# Altium PCB 780-00002 rev 2, Sinistro Clock Gen.PcbDoc (part 3 of 6)
Units mil, origin at the board's own origin, x right, y up, seen from the top; angles counter-clockwise.
Board outline 5905.51 x 4330.71 mil, 10 copper layers (Top Layer (.GTL), MidLayer1 (*.G1), +12V (*.GP1), -12V (*.GP2), A & GND (*.GP3), Chassis E (*.GP4), +28V & VCC (*.GP5), MidLayer2 (*.G2), MidLayer3 (*.G3), Bottom Layer (.GBL)), stack 64.6 mil thick; 495 components, 327 nets, 1939 pads, 938 vias.
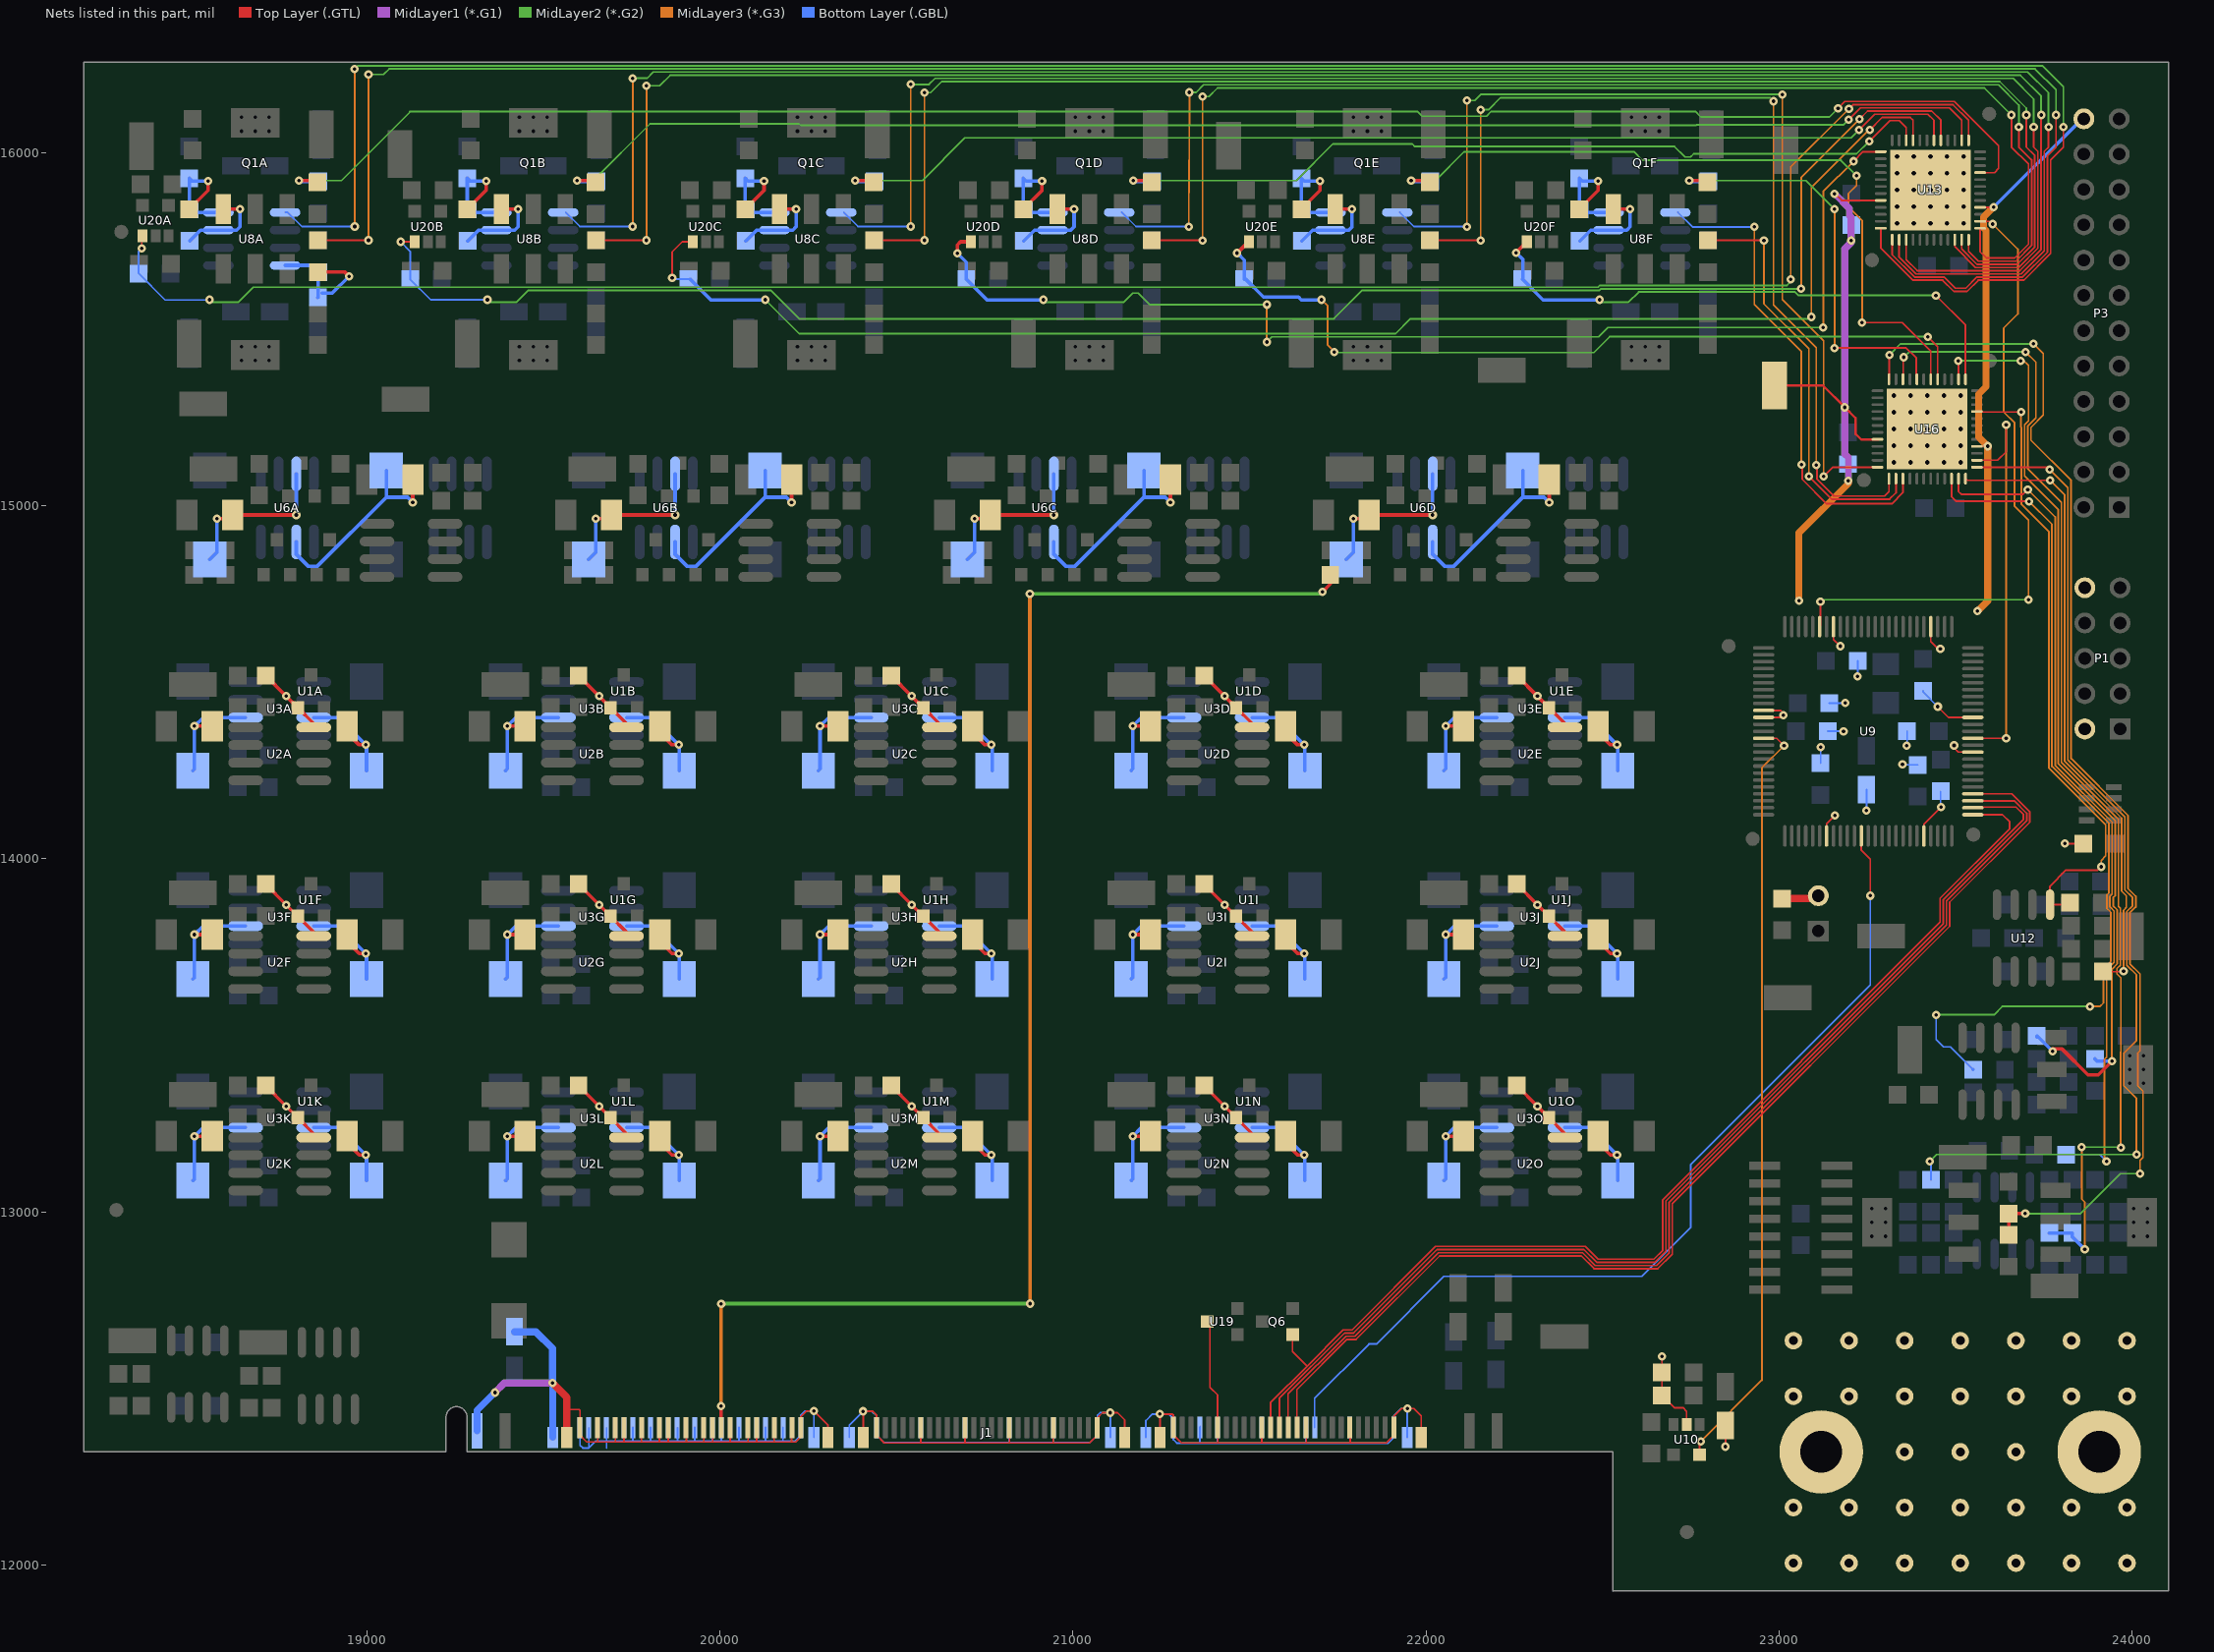
[diagram p11: the nets of this part, all layers, seen from the top]

## Via types
v1: diameter 24, hole 10, Top Layer (.GTL) to Bottom Layer (.GBL), 938 vias

## Nets (pads, with @x,y where several pads share a name; then routed paths per layer and width w, separated by ;. In a path a pad name is that pad's centre, name@x,y a point inside that pad or via, vN(x,y) a via of type N, cw(c..) or ccw(c..) an arc to the next point about the centre after c; other vN are vias at no path point) (continued)
CDO19: J1.123 R4D.2 | length 4124.3
  Top Layer (.GTL) w10: v1(20003,12450) 20004,12449 J1.123@20004,12388.09 ; v1(21706.5,14755) 21728.91,14777.4 R4D.2@21728.91,14803.31
  MidLayer2 (*.G2) w10: v1@20004,12740 v1(20879,12740) ; v1(20878,14750) v1@21708,14750
  MidLayer3 (*.G3) w10: v1(20003,12450) 20003,12738 v1(20004,12739) ; v1(20878,14750) v1(20879,12740)
CLK_100: U9.14 U10.5 | length 2173.5
  Top Layer (.GTL) w5: U10.5@22775,12312 22775,12347 v1(22778,12350) ; U9.14@22956.15,14340.95 22993.05,14340.95 v1(23014,14320)
  MidLayer3 (*.G3) w5: v1(22778,12350) 22951,12523 22951,14257 v1(23014,14320)
DAC_HI1: U8A.1 U13.12 | length 6647.7
  Top Layer (.GTL) w5: U13.12@23287.74,15785.22 23287.74,15730.08 23379.82,15638 23463.27,15638 23494.77,15606.5 23532.5,15606.5 23564,15638 23693.1,15638 23769,15713.9 23769,15979 23805,16015 v1(23805,16072)
  MidLayer2 (*.G2) w5: v1(18965,16236) 18974.5,16245.5 23745.39,16245.5 23805,16185.89 v1(23805,16072)
  MidLayer3 (*.G3) w5: v1(18965,16236) 18966,16235 v1(18966,15790)
  Bottom Layer (.GBL) w5: U8A.1@18768.94,15830.04 18776.34,15830.04 18816.38,15790 v1(18966,15790)
DAC_HI2: U8B.1 U13.14 | length 5634.2
  Top Layer (.GTL) w5: U13.14@23339.9,15752.74 23339.9,15703.37 23387.27,15656 23685.64,15656 23751,15721.36 23751,16003 23763,16015 v1(23763,16072)
  MidLayer2 (*.G2) w5: v1(19753.4,16210) 19794,16210 19811.5,16227.5 23703.99,16227.5 23763,16168.49 v1(23763,16072)
  MidLayer3 (*.G3) w5: v1@19746,16210 v1(19753.4,16210) v1(19753.4,15790)
  Bottom Layer (.GBL) w5: U8B.1@19563.74,15830.04 19603.78,15790 v1(19753.4,15790)
DAC_HI3: U8C.1 U13.22 | length 4549.8
  Top Layer (.GTL) w5: U13.22@23497.38,15752.74 23497.38,15733.16 23556.54,15674 23678.18,15674 23733,15728.82 23733,16003 23721,16015 v1(23721,16072)
  MidLayer2 (*.G2) w5: v1(20540.8,16192.49) 20592.49,16192.49 20609.5,16209.5 23662.6,16209.5 23721,16151.1 v1(23721,16072)
  MidLayer3 (*.G3) w5: v1(20540.8,15790) v1(20540.8,16192.49)
  Bottom Layer (.GBL) w5: U8C.1@20351.14,15830.04 20391.18,15790 v1(20540.8,15790)
DAC_HI4: U8D.1 U13.24 | length 3622
  Top Layer (.GTL) w5: U13.24@23536.76,15752.74 23536.76,15719.25 23564,15692 23670.73,15692 23715,15736.27 23715,15979 23679,16015 v1(23679,16072)
  MidLayer2 (*.G2) w5: v1(21330,16170) 21349,16170 21370.5,16191.5 23621.2,16191.5 23679,16133.7 v1(23679,16072)
  MidLayer3 (*.G3) w5: v1(21328.4,15789.78) v1(21330,16170)
  Bottom Layer (.GBL) w5: U8D.1@21138.54,15830.04 21178.58,15790 v1@21328.2,15790
DAC_HI5: U8E.1 U16.12 | length 2757.9
  Top Layer (.GTL) w5: v1(23126,15082) 23152.48,15108.48 U16.12@23278.74,15108.48
  MidLayer2 (*.G2) w5: v1(22115.8,16147) 22138,16147 22155,16164 v1(23009,16164)
  MidLayer3 (*.G3) w5: v1(22115.8,15789.78) v1(22115.8,16147) ; v1(23009,16164) 23009,15584 23126,15467 v1(23126,15082)
  Bottom Layer (.GBL) w5: U8E.1@21925.94,15830.04 21965.98,15790 v1@22115.61,15790
DAC_HI6: U8F.1 U16.15 | length 1370.7
  Top Layer (.GTL) w5: v1(23063,15116) 23065.5,15113.5 23065.5,15074.34 23134.84,15005 23319,15005 23350.59,15036.59 U16.15@23350.59,15076
  MidLayer3 (*.G3) w5: v1(22930,15789) 22930,15569 23063,15436 v1(23063,15116)
  Bottom Layer (.GBL) w5: U8F.1@22713.34,15830.04 22754.38,15789 v1(22930,15789)
DAC_LO1: R10A.2 U13.13 | length 6456.9
  Top Layer (.GTL) w5: R10A.2@18861.46,15750.83 19004.83,15750.83 v1(19005,15751) ; U13.13@23320.22,15752.74 23320.22,15710.32 23383.54,15647 23467,15647 23498.5,15615.5 23528.77,15615.5 23560.27,15647 23689.37,15647 23760,15717.63 23760,15991 23784,16015 v1(23784,16106)
  MidLayer2 (*.G2) w5: v1(19005,16221) 19048,16221 19063.5,16236.5 23724.69,16236.5 23784,16177.19 v1(23784,16106)
  MidLayer3 (*.G3) w5: v1(19005,15751) v1(19005,16221)
DAC_LO2: R10B.2 U13.15 | length 5478.8
  Top Layer (.GTL) w5: R10B.2@19648.87,15750.83 v1@19792.23,15750.83 ; U13.15@23359.59,15752.74 23359.59,15696.41 23391,15665 23681.91,15665 23742,15725.09 v1(23742,16106)
  MidLayer2 (*.G2) w5: v1(19792.4,16189) 19830,16189 19859.5,16218.5 23683.29,16218.5 23742,16159.79 v1(23742,16106)
  MidLayer3 (*.G3) w5: v1(19792.4,15751) v1(19792.4,16189)
DAC_LO3: R10C.2 U13.23 | length 4400.4
  Top Layer (.GTL) w5: R10C.2@20436.27,15750.83 v1@20579.63,15750.83 ; U13.23@23517.07,15752.74 23517.07,15726.2 23560.27,15683 23674.46,15683 23724,15732.54 23724,15991 23700,16015 v1(23700,16106)
  MidLayer2 (*.G2) w5: v1(20579.8,16169) 20597,16169 20628.5,16200.5 23624.93,16200.5 23700,16125.43 v1(23700,16106)
  MidLayer3 (*.G3) w5: v1(20579.8,15751) v1(20579.8,16169)
DAC_LO4: R10D.2 U13.25 | length 3495.6
  Top Layer (.GTL) w5: R10D.2@21223.67,15750.83 v1@21367.03,15750.83 ; U13.25@23569.24,15785.22 23569.24,15718.76 23587,15701 23667,15701 23706,15740 23706,15967 23658,16015 v1(23658,16106)
  MidLayer2 (*.G2) w5: v1(21367.4,16158) 21385,16158 21409.5,16182.5 23581.5,16182.5 v1(23658,16106)
  MidLayer3 (*.G3) w5: v1(21367.4,15750.78) v1(21367.4,16158)
DAC_LO5: R10E.2 U16.13 | length 2748
  Top Layer (.GTL) w5: R10E.2@22011.07,15750.83 v1@22154.43,15750.83 ; v1(23105,15115) 23107.5,15112.5 23107.5,15074.34 23154.84,15027 23299,15027 23311.22,15039.22 U16.13@23311.22,15076
  MidLayer2 (*.G2) w5: v1(22154.8,16121) 22177,16121 22211,16155 22974,16155 v1(22984,16145)
  MidLayer3 (*.G3) w5: v1(22154.8,15750.78) v1(22154.8,16121) ; v1(22984,16145) 22984,15568 23105,15447 v1(23105,15115)
DAC_LO6: R10F.2 U16.14 | length 1200.9
  Top Layer (.GTL) w5: R10F.2@22798.47,15750.83 v1(22957,15750.83) ; v1(23084,15082) 23148,15018 23313,15018 23330.91,15035.91 U16.14@23330.91,15076
  MidLayer3 (*.G3) w5: v1(22957,15750.83) 22957,15571 23084,15444 v1(23084,15082)
DAC_VDD: R42.1 U16.22 | length 2504
  Top Layer (.GTL) w5: U16.22@23488.39,15076 23488.39,15025.61 23502.15,15011.85 v1(23707.85,15011.85)
  MidLayer2 (*.G2) w5: v1(23444.46,13557.84) 23608.29,13557.84 23631.79,13581.34 23879.33,13581.34 v1@23880,13582
  MidLayer3 (*.G3) w5: v1(23707.85,15011.85) 23772.78,14946.92 23772.78,14260.95 23934,14099.73 23934,13903.12 23927.96,13897.07 23927.96,13859.38 23939.46,13847.88 23939.46,13709.57 23918.5,13688.62 23918.5,13591.5 23909,13582 23880.67,13582 v1(23880,13581.34)
  Bottom Layer (.GBL) w5: v1(23444.46,13557.84) 23444.46,13487.84 23465.46,13466.84 23485.46,13466.84 R42.1@23549.46,13402.84
DAC_VOD: R28.1 U16.25 | length 2941
  Top Layer (.GTL) w5: U16.25@23560.24,15108.48 23759.71,15108.48 v1(23766.6,15101.6)
  MidLayer2 (*.G2) w5: v1(23426.72,13142.54) 23446.22,13162.04 v1(24012,13162.04)
  MidLayer3 (*.G3) w5: v1(23766.6,15101.6) 23817.78,15050.41 23817.78,14279.59 23979,14118.37 23979,13996.64 23979,13911.58 24000.96,13889.62 24000.96,13866.84 23984.46,13850.34 23984.46,13698.39 24012,13670.85 24012,13484.66 23976.38,13449.04 23976.38,13356.63 24012,13321.02 v1(24012,13162.04)
  Bottom Layer (.GBL) w5: v1(23426.72,13142.54) 23430.21,13139.05 R28.1@23430.21,13089.92
DAC_VOG: R22.1 U16.24 | length 1782.9
  Top Layer (.GTL) w5: U16.24@23527.76,15076 23532.51,15071.25 v1(23767.25,15071.25) ; R22.1@23917,13680 23974.23,13680 v1(23975.46,13681.23)
  MidLayer3 (*.G3) w5: v1(23767.25,15071.25) 23808.78,15029.71 23808.78,14275.86 23970,14114.64 23970,13907.85 23983,13894.85 23983,13861.61 23975.46,13854.06 v1(23975.46,13681.23)
DAC_VRD: R48.1 U16.23 | length 2385.8
  Top Layer (.GTL) w5: U16.23@23508.07,15076 23508.07,15039.93 23516,15032 23691,15032 v1(23704.2,15045.2)
  MidLayer2 (*.G2) w5: v1@23926.54,13142.54 v1(23927,13143)
  MidLayer3 (*.G3) w5: v1(23704.2,15045.2) 23781.78,14967.62 23781.78,14264.67 23943,14103.46 23943,13899.39 23936.96,13893.35 23936.96,13863.11 23948.46,13851.61 23948.46,13705.85 23927.5,13684.89 23927.5,13438.04 23920.96,13431.5 23920.96,13149.04 v1(23927,13143)
  Bottom Layer (.GBL) w5: R48.1@23813,13162.04 23907.96,13162.04 v1(23927,13143)
DRV_SEL_N: J1.29 Q6.1 U9.51 | length 3269.6
  Top Layer (.GTL) w5: J1.29@21559.5,12389.15 21559.5,12459.58 21662.96,12563.04 ; Q6.1@21622,12652 21622,12604 21662.96,12563.04 ; 22670.5,12932.5 22670.5,12891.34 ; U9.51@23548.67,14124.41 23632.59,14124.41 23653.09,14103.91 23653.09,14084.91 23456,13887.82 23456,13819.82 22670.5,13034.32 22670.5,12891.34 ; 21662.96,12563.04 21765.43,12665.5 21790.9,12665.5 22027.27,12901.87 22450.95,12901.87 22486.82,12866 22645.16,12866 22670.5,12891.34
E: pad.0 pad.1 pad.2 pad.3 pad.4 pad.5 U13.0 U16.0
GND: C7.2 C12.1 C16.1 C17.1 C18.1 C19.1 C20.1 C21.1 C23.1 C24.1 C26.1 C31.1 C32.2 C34.1 C36.1 C55.2 C56.2 J1.1 J1.2 J1.11 J1.12 J1.21 J1.22 J1.31 J1.32 J1.41 J1.42 J1.46 J1.51 J1.52 J1.53 J1.54 J1.63 J1.64 J1.73 J1.74 J1.83 J1.84 J1.93 J1.94 J1.103 J1.104 J1.105 J1.106 J1.107 J1.110 J1.111 J1.114 J1.115 J1.116 J1.117 J1.120 J1.121 J1.124 J1.125 J1.126 J1.127 J1.130 J1.131 J1.134 J1.135 J1.136 J1.137 J1.140 J1.141 J1.144 J1.145 J1.146 J1.147 J1.150 J1.151 J1.154 J1.155 J1.156 J1.157 J1.158 J1.159 J1.160 J1.161 J1.162 J1.163 J1.164 J1.165 J1.166 J1.167 J1.168 J1.PC08 P1.2 P1.10 P2.2 P3.24 TP15.1 U9.10 U9.11 U9.32 U9.46 U9.60 U9.65 U9.79 U9.93 U10.2 U13.8 U13.28 U16.8 U16.28 U19.3 | length 14089.1
  Top Layer (.GTL) w5: 19566.5,12440 19601,12440 19604,12437 J1.155@19604,12388.09 19601,12385.08 19601,12369.9 19622.9,12348 19654,12348 ; J1.151@19654,12388.09 19654,12348 ; J1.147@19704,12366.9 J1.147@19704,12388.09 19704,12348.01 ; J1.145@19729,12388.09 19729,12348 ; J1.141@19778,12388.09 19778,12348 ; J1.137@19829,12388.09 19829,12348 ; J1.135@19854,12388.09 19854,12348 ; J1.131@19905,12388.09 19905,12348 ; J1.127@19955,12388.09 19955,12348 ; J1.125@19980,12388.09 19980,12348 ; J1.121@20029,12388.09 20029,12348 ; J1.117@20080,12388.09 20080,12348 ; J1.115@20104,12388.09 20104,12348 ; J1.111@20154,12388.09 20154,12348 ; J1.107@20203,12388.09 20203,12348 ; J1.105@20229,12362.01 20215,12348 20203,12348 ; J1.105@20229,12388.09 20229,12419 20246,12436 v1(20266,12436) 20306.5,12395.5 J1.165@20306.5,12361.09 ; J1.163@20406.5,12361.09 20406.5,12434.5 v1(20406,12435) 20433,12435 20444.16,12423.84 J1.103@20444.16,12388.09 20444.16,12366.9 20465.9,12345.16 21047.43,12345.16 21069.16,12366.9 J1.53@21069.16,12388.09 21069.16,12416.16 21084,12431 v1(21106,12431) 21126,12431 21146.5,12410.5 J1.161@21146.5,12361.09 ; 20569,12345.16 J1.93@20569,12393.08 ; 20694,12345.16 J1.83@20694,12393.09 ; 20820,12345.16 J1.73@20820,12393.09 ; 20944,12345.16 J1.63@20944,12393.09 ; v1(21246,12427) v1@21246.5,12426.5 ; J1.159@21246.5,12361.09 v1@21246.5,12426.5 ; U19.3@21380,12689 21388,12681 21388,12503 21409.5,12481.5 J1.41@21409.5,12389.15 ; J1.41@21410,12394.09 21410,12345.5 ; J1.31@21535,12394.09 21535,12345.5 ; J1.21@21661,12394.09 21661,12345.5 ; J1.11@21785,12394.09 21785,12345.5 ; J1.157@21986.5,12361.09 21986.5,12422.5 21966,12443 v1(21947,12443) 21931,12443 21909.5,12421.5 J1.1@21909.5,12389.15 21909.5,12367.96 21887.05,12345.5 21785,12345.5 ; v1(22668,12590) C12.1@22668,12545 C16.1@22668,12480 22703,12445 22728,12445 22738,12435 U10.2@22738,12398 ; v1(22848,12335) C7.2@22848,12395 ; U9.11@22956.15,14400 23005.78,14400 v1(23012.41,14406.63) 23012.41,14411.63 23004.35,14419.69 U9.10@22956.15,14419.69 ; TP15.1@22987,15340 23076,15340 ; P2.2@23103,13887 P2.2@23111,13895 ; U9.32@23134.3,14064.37 23134.3,14098.52 v1(23158.41,14122.63) ; U9.93@23153.98,14656.89 23153.98,14621.05 v1(23173.41,14601.63) ; v1@23158,15883 23177.04,15863.96 U13.8@23287.74,15863.96 ; U9.46@23409.89,14064.37 23409.89,14097.11 v1(23458.41,14145.63) ; U9.79@23429.57,14656.89 23429.57,14614.46 23450.41,14593.63 v1(23456.41,14593.63) ; v1(23449.41,14430.63) 23480.04,14400 U9.65@23548.67,14400 ; v1(23495.41,14320.63) 23495.41,14313.63 23507.46,14301.58 U9.60@23548.67,14301.58 ; U16.28@23560.24,15167.54 23590.54,15167.54 v1(23591,15168) ; U13.28@23569.24,15844.28 23606.28,15844.28 v1(23607,15845) ; v1(23809,14043) 23809.29,14042.71 C17.1@23862,14042.71 ; 19654,12348 19704,12348 ; 19704,12348 19729,12348 ; 19729,12348 19778,12348 ; 19778,12348 19829,12348 ; 19829,12348 19854,12348 ; 19854,12348 19905,12348 ; 19905,12348 19955,12348 ; 19955,12348 19980,12348 ; 19980,12348 20029,12348 ; 20029,12348 20080,12348 ; 20080,12348 20104,12348 ; 20104,12348 20154,12348 ; 20154,12348 20203,12348 ; v1@21246.5,12426.5 21282.5,12426.5 21284.5,12424.5 J1.51@21284.5,12389.15 21284.5,12367.96 21306.96,12345.5 21410,12345.5 ; 21410,12345.5 21535,12345.5 ; 21535,12345.5 21661,12345.5 ; 21661,12345.5 21785,12345.5
  Top Layer (.GTL) w7: TP15.1@22987,15340 23124,15340 v1(23186,15278) 23216.5,15247.5 23216.5,15202.85 23232.59,15186.76 23278.28,15186.76 U16.8@23278.74,15187.22
  Top Layer (.GTL) w20: v1(19526,12515) 19566.5,12474.5 19566.5,12440 J1.167@19566.5,12361.09 ; C56.2@23009,13887 P2.2@23103,13887
  MidLayer1 (*.G1) w20: v1(19363,12488) 19390,12515 v1(19526,12515) ; v1(23157,15883) 23199.16,15840.84 23199.16,15821.61 ; v1(23196,15070.26) 23196,15135.77 23186,15145.77 v1(23186,15278) 23186,15726.77 v1@23204,15744.77 ; v1(23204,15750) 23204,15816.77
  MidLayer3 (*.G3) w20: v1(23056,14730) 23056,14922.33 23196,15062.33 v1(23196,15070.26) ; v1(23562,14701) 23591,14730 v1(23591,15168) 23565,15194 23565,15315.23 23586,15336.23 23586,15779.23 23579,15786.23 23579,15817 v1(23607,15845)
  Bottom Layer (.GBL) w5: J1.156@19604,12388.09 19604,12339 19612.01,12331 19629,12331 ; J1.154@19629,12388.09 19629,12331 ; 19679,12331 J1.150@19679,12388.09 ; 19729,12351 J1.146@19729,12389.09 ; 19754,12351 J1.144@19754,12389.09 ; 19804,12351 J1.140@19804,12390.09 ; 19854,12351 J1.136@19854,12389.09 ; 19880,12351 J1.134@19880,12388.09 ; 19929,12351 J1.130@19929,12389.09 ; 19979,12351 J1.126@19979,12389.09 ; 20004,12351 J1.124@20004,12389.09 ; 20054,12351 J1.120@20054,12389.09 ; 20104,12351 J1.116@20104,12389.09 ; 20129,12351 J1.114@20129,12390.09 ; 20179,12351 J1.110@20179,12390.09 ; J1.166@20266.5,12361.09 20266.5,12435.5 v1(20266,12436) 20241,12436 20229,12424 J1.106@20229,12388.09 20229,12366.89 20213.11,12351 19649,12351 19629,12331 ; J1.164@20366.5,12361.09 20366.5,12395.5 v1(20406,12435) 20431,12435 20444.16,12421.84 J1.104@20444.16,12388.09 20444.16,12366.9 20465.06,12346 21048.27,12346 21070,12367.73 21070,12387.25 J1.54@21069.16,12388.09 21069.16,12423.16 21077,12431 v1(21106,12431) 21106.5,12430.5 J1.162@21106.5,12361.09 ; 20569,12346 J1.94@20569,12390.08 ; 20694,12346 J1.84@20694,12390.08 ; 20819,12346 J1.74@20819,12390.08 ; 20944,12346 J1.64@20944,12390.08 ; J1.160@21206.5,12361.09 21206.5,12408.5 21225,12427 v1(21246,12427) 21271,12427 21284.5,12413.5 J1.52@21284.5,12389.15 21284.5,12354.5 21294,12345 21893,12345 21909.5,12361.5 J1.2@21909.5,12389.15 21909.5,12423.5 21929,12443 v1(21947,12443) 21946.5,12442.5 J1.158@21946.5,12361.09 ; 21359.5,12346.5 J1.46@21359.5,12389.15 ; J1.46@21360,12368.45 J1.46@21360,12392.08 ; 21409.5,12345.5 J1.42@21409.5,12389.15 ; J1.42@21410,12367.46 J1.42@21410,12392.08 ; 21534.5,12347.5 J1.32@21534.5,12389.15 ; J1.32@21535,12368.45 J1.32@21535,12392.08 ; J1.22@21659,12368.46 J1.22@21659,12392.08 ; 21659.5,12346.5 J1.22@21659.5,12389.15 ; J1.12@21784,12367.45 J1.12@21784,12392.08 ; 21784.5,12345.5 J1.12@21784.5,12389.15 ; C18.1@23117.41,14270.63 v1(23117.41,14315.63) ; C26.1@23137.41,14360.63 v1(23182.41,14360.63) ; C19.1@23142.41,14440.63 v1(23187.41,14440.63) ; v1@23195,15071.26 C36.1@23195,15117.26 ; v1(23204,15750) C34.1@23204,15794 ; v1(23222.41,14515.63) C23.1@23222.41,14560.63 ; v1(23247.41,14136.63) C32.2@23247.41,14195.63 ; v1(23349.41,14266.63) 23350.41,14265.63 C20.1@23392.41,14265.63 ; v1(23361.41,14319.63) 23362.41,14320.63 C31.1@23362.41,14360.63 ; C21.1@23407.41,14475.63 23407.41,14472.63 v1(23449.41,14430.63) ; C24.1@23457.41,14190.63 23457.41,14146.63 v1(23458.41,14145.63)
  Bottom Layer (.GBL) w10: v1(23607,15845) 23607.7,15845 23857.7,16095 P3.24@23863,16095
  Bottom Layer (.GBL) w20: J1.PC08@19312.6,12379.15 19312.6,12437.6 v1(19363,12488) ; C55.2@19418,12660 19479,12660 19526,12613 v1(19526,12515) 19526.5,12514.5 J1.168@19526.5,12361.09
I_ADDR0: J1.23 U9.54 | length 3213
  Top Layer (.GTL) w5: J1.23@21634.5,12389.15 21634.5,12496.4 21776.61,12638.5 21802.09,12638.5 22038.46,12874.87 22439.77,12874.87 22475.64,12839 22512,12839 22656.35,12839 22697.5,12880.15 22697.5,13023.14 23483,13808.64 23483,13876.64 23710,14103.64 23710,14132.36 23658.9,14183.47 U9.54@23548.67,14183.47
I_ADDR1: J1.25 U9.53 | length 3241.5
  Top Layer (.GTL) w5: J1.25@21609.5,12389.15 21609.5,12484.12 21772.88,12647.5 21798.36,12647.5 22034.73,12883.87 22443.5,12883.87 22479.37,12848 22512,12848 22652.62,12848 22688.5,12883.88 ; 22688.5,12925.04 22688.5,12883.88 ; U9.53@23548.67,14163.78 23665.85,14163.78 23701,14128.63 23701,14107.37 23474,13880.37 23474,13812.37 22688.5,13026.87 22688.5,12883.88
I_ADDR2: J1.27 U9.52 | length 3230.3
  Top Layer (.GTL) w5: J1.27@21584.5,12389.15 21584.5,12471.85 21769.15,12656.5 21794.63,12656.5 22031,12892.87 22447.23,12892.87 22483.1,12857 22512,12857 22648.89,12857 22679.5,12887.61 ; 22679.5,12928.77 22679.5,12887.61 ; U9.52@23548.67,14144.1 23550.57,14146 23670.91,14146 23692,14124.9 23692,14111.1 23465,13884.1 23465,13816.1 22679.5,13030.6 22679.5,12887.61
LOAD_MAX1_N: U9.95 U13.26 | length 1841.2
  Top Layer (.GTL) w5: U9.95@23114.61,14656.89 23117,14659.28 v1(23117,14728) ; U13.26@23569.24,15804.91 23597.09,15804.91 v1(23605,15797)
  MidLayer2 (*.G2) w5: v1(23117,14728) 23122,14733 v1(23706,14733)
  MidLayer3 (*.G3) w5: v1(23605,15797) 23676,15726 23676,15542.33 23636,15502.33 23636,15265.27 23667,15234.27 23667,14997.54 23706,14958.54 v1(23706,14733)
  other v1: 23117,14728 23706,14733
LOAD_MAX2_N: U9.62 U16.26 | length 1151.9
  Top Layer (.GTL) w5: U9.62@23548.67,14340.95 23548.72,14341 v1(23643,14341) ; U16.26@23560.24,15128.17 23618.97,15128.17 23643,15152.2 v1(23643,15229)
  MidLayer3 (*.G3) w5: v1(23643,14341) v1(23643,15229)
MON_HI1: R13A.1 R14A.2 U13.33 | length 5214
  Top Layer (.GTL) w5: v1(23167,16125) 23186,16144 23496.48,16144 23621.5,16018.98 23621.5,15954.5 23609.7,15942.7 U13.33@23569.24,15942.7
  Top Layer (.GTL) w10: v1(18808.31,15920.39) 18859.22,15920.39 R13A.1@18861.46,15918.15
  MidLayer2 (*.G2) w5: v1(18808.31,15920.39) 18928.39,15920.39 19121,16113 19122.25,16116.03 21975.49,16116.03 21989.01,16102.5 22171.23,16102.5 22184.75,16116.03 22762.89,16116.03 22778.92,16100 23142,16100 v1(23167,16125)
  Bottom Layer (.GBL) w10: v1(18808.31,15920.39) 18810.56,15918.15 R14A.2@18862.88,15918.15
MON_HI2: R13B.1 R14B.2 U13.38 | length 4190.6
  Top Layer (.GTL) w5: v1(23196.95,16093.05) 23229.9,16126 23482.07,16126 23517.07,16091 U13.38@23517.07,16034.24
  Top Layer (.GTL) w10: v1(19595.72,15920.39) 19646.62,15920.39 R13B.1@19648.87,15918.15
  MidLayer2 (*.G2) w5: v1(19595.72,15920.39) 19641.79,15920.39 19802.4,16081 20224.68,16081 20228.65,16077.03 22764.88,16077.03 22765.85,16078 23181.9,16078 v1(23196.95,16093.05)
  Bottom Layer (.GBL) w10: v1(19595.72,15920.39) 19597.96,15918.15 R14B.2@19650.28,15918.15
MON_HI3: R13C.1 R14C.2 U13.42 | length 3306.3
  Top Layer (.GTL) w5: v1(23226.65,16063.35) 23271.3,16108 23421.33,16108 23438.33,16091 U13.42@23438.33,16034.24
  Top Layer (.GTL) w10: v1(20383.12,15920.39) 20434.02,15920.39 R13C.1@20436.27,15918.15
  MidLayer2 (*.G2) w5: v1(20383.12,15920.39) 20573.39,15920.39 20694,16041 23204.3,16041 v1(23226.65,16063.35)
  Bottom Layer (.GBL) w10: v1(20383.12,15920.39) 20385.36,15918.15 R14C.2@20437.68,15918.15
MON_HI4: R13D.1 R14D.2 U13.46 | length 2443.8
  Top Layer (.GTL) w5: v1(23255,16032) 23256,16032 23314,16090 23340,16090 23359.59,16070.41 U13.46@23359.59,16034.24
  Top Layer (.GTL) w10: v1(21170.52,15920.39) 21221.43,15920.39 R13D.1@21223.67,15918.15
  MidLayer2 (*.G2) w5: v1(21170.52,15920.39) 21632.55,15920.39 21735.97,16023.82 21961.37,16023.82 21968.61,16016.58 22703.69,16016.58 22733.45,15986.82 22748.77,15986.82 22757.96,15996 23219,15996 v1(23255,16032)
  Bottom Layer (.GBL) w10: v1(21170.52,15920.39) 21172.76,15918.15 R14D.2@21225.08,15918.15
MON_HI5: R13E.1 R14E.2 U16.42 | length 2182.1
  Top Layer (.GTL) w5: v1(23235,15518) 23349,15518 23429.33,15437.67 U16.42@23429.33,15357.5
  Top Layer (.GTL) w10: v1(21957.92,15920.39) 22008.83,15920.39 R13E.1@22011.07,15918.15
  MidLayer2 (*.G2) w5: v1(21957.92,15920.39) 22026.6,15920.39 22108.21,16002 22589,16002 22613.18,15977.82 23175.18,15977.82 v1(23219,15934)
  MidLayer3 (*.G3) w5: v1(23219,15934) 23219,15906.25 23196,15883.25 23196,15846 23235,15807 v1(23235,15518)
  Bottom Layer (.GBL) w10: v1(21957.92,15920.39) 21960.17,15918.15 R14E.2@22012.49,15918.15
MON_HI6: R13F.1 R14F.2 U16.44 | length 1251.9
  Top Layer (.GTL) w5: v1(23157,15446) 23360,15446 23388.5,15417.5 23388.5,15358.96 U16.44@23389.96,15357.5
  Top Layer (.GTL) w10: v1(22745.32,15920.39) 22796.23,15920.39 R13F.1@22798.47,15918.15
  MidLayer2 (*.G2) w5: v1(22745.32,15920.39) 23075.61,15920.39 v1(23157,15839)
  MidLayer3 (*.G3) w5: v1(23157,15446) v1(23157,15839)
  Bottom Layer (.GBL) w10: v1(22745.32,15920.39) 22747.57,15918.15 R14F.2@22799.89,15918.15
MON_LO1: R23A.1 U13.37 U20A.1 | length 5825.2
  Top Layer (.GTL) w5: v1(18363,15728) 18363,15762 U20A.1@18365,15764 ; v1(23197.6,16123.4) 23209.21,16135 23492.76,16135 23536.76,16091 U13.37@23536.76,16034.24
  MidLayer2 (*.G2) w5: v1(18554.38,15582.8) 18561.07,15576.11 18636.84,15576.11 18679.17,15618.43 22487.24,15618.43 22491.81,15623 23022,15623 23033,15634 v1(23033,15640)
  MidLayer3 (*.G3) w5: v1(23033,15640) 23033,15958.79 v1(23197.6,16123.4)
  Bottom Layer (.GBL) w5: v1(18363,15728) 18354,15719 R23A.1@18354,15657 18428.91,15582.09 v1@18553.67,15582.09
  Bottom Layer (.GBL) w10: v1@18553.67,15582.09 v1(18554.38,15582.8)
MON_LO2: R23B.1 U13.41 U20B.1 | length 5063
  Top Layer (.GTL) w5: v1(19096,15747) U20B.1@19136,15747 ; v1(23227.3,16093.7) 23250.6,16117 23432.01,16117 23458.01,16091 U13.41@23458.01,16034.24
  MidLayer2 (*.G2) w5: v1(19341.78,15582.8) 19348.47,15576.11 19424.25,15576.11 19457.57,15609.43 20144.57,15609.43 20225.14,15528.86 21739.21,15528.86 21819.77,15609.43 22490.97,15609.43 22494.64,15613.11 22573.85,15613.11 22574.37,15613.63 v1(23062.32,15613.63)
  MidLayer3 (*.G3) w5: v1(23062.32,15613.63) 23062.32,15928.72 v1(23227.3,16093.7)
  Bottom Layer (.GBL) w5: v1(19096,15747) 19123,15720 R23B.1@19123,15641 19181.2,15582.8 v1(19341.78,15582.8)
  Bottom Layer (.GBL) w10: v1@19341.07,15582.09 v1(19341.78,15582.8)
  other v1: 19341.78,15582.8
MON_LO3: R23C.1 U13.45 U20C.1 | length 4252.7
  Top Layer (.GTL) w5: v1(19865,15645) 19865,15718 19894,15747 U20C.1@19923.4,15747 ; v1(23257,16064) 23292,16099 23371.28,16099 23379.28,16091 U13.45@23379.28,16034.24
  MidLayer2 (*.G2) w5: v1(20129.18,15582.8) 20225.44,15486.54 21913.42,15486.54 21955.74,15528.86 23085.86,15528.86 v1(23091,15534)
  MidLayer3 (*.G3) w5: v1(23091,15534) 23091,15901 23254,16064 v1(23257,16064)
  Bottom Layer (.GBL) w5: v1(19865,15645) 19869,15641 R23C.1@19910.4,15641 R23C.1@19916,15641
  Bottom Layer (.GBL) w10: R23C.1@19916,15641 19974.91,15582.09 20128.47,15582.09 v1(20129.18,15582.8)
MON_LO4: R23D.1 U13.1 U20D.1 | length 3344.7
  Top Layer (.GTL) w5: v1(23211,15975) 23237.76,16001.76 U13.1@23287.74,16001.76
  Top Layer (.GTL) w10: v1(20673,15714) 20673,15738 20682,15747 U20D.1@20710.8,15747
  MidLayer2 (*.G2) w5: v1(20916.58,15582.8) 20923.27,15576.11 21144.56,15576.11 21169.75,15601.3 21185.07,15601.3 21217.37,15569 v1(21549,15569) ; v1(21549,15463) 21563.54,15477.54 22489.06,15477.54 22515.52,15504 v1(23125,15504)
  MidLayer3 (*.G3) w5: v1(21549,15463) v1(21549,15569) ; v1(23125,15504) 23125,15889 v1(23211,15975)
  Bottom Layer (.GBL) w10: v1(20673,15714) 20697.8,15689.2 R23D.1@20697.8,15641 20756.72,15582.09 20915.87,15582.09 v1(20916.58,15582.8)
MON_LO5: R23E.1 U16.41 U20E.1 | length 2365.2
  Top Layer (.GTL) w5: v1(23421,15478) 23449.02,15449.98 U16.41@23449.02,15357.5
  Top Layer (.GTL) w10: v1(21465,15715) 21497,15747 U20E.1@21498.2,15747
  MidLayer2 (*.G2) w5: v1(21740,15435) 21741.58,15433.42 22475.42,15433.42 22520,15478 v1(23421,15478)
  MidLayer3 (*.G3) w5: v1(21703.99,15582.8) 21721.5,15565.28 21721.5,15454.5 v1@21740,15436
  Bottom Layer (.GBL) w10: v1(21465,15715) 21485.21,15694.79 R23E.1@21485.21,15641 21489,15641 21540,15590 21638.98,15590 21646.9,15582.09 v1@21703.28,15582.09
MON_LO6: R23F.1 U16.37 U20F.1 | length 1614
  Top Layer (.GTL) w5: v1(23444,15595) 23527.76,15511.24 U16.37@23527.76,15357.5
  Top Layer (.GTL) w10: v1(22255,15716) 22255,15716.39 U20F.1@22285.61,15747
  MidLayer2 (*.G2) w5: v1(22491.39,15582.8) 22498.08,15576.11 22573.85,15576.11 22602.37,15604.63 23045.16,15604.63 23054.66,15595.13 23443.88,15595.13 v1(23444,15595)
  Bottom Layer (.GBL) w10: v1(22255,15716) 22274,15697 22274,15642.39 R23F.1@22272.61,15641 22331.52,15582.09 22490.68,15582.09 v1(22491.39,15582.8)
MON_VDD: R43.1 R44.1 U16.38 | length 2698.3
  Top Layer (.GTL) w5: v1(23507,15410) 23508.07,15408.93 U16.38@23508.07,15357.5
  Top Layer (.GTL) w10: v1(23774.46,13454.84) 23774.46,13460.84 23801.46,13460.84 23874.46,13387.84 23903.46,13387.84 v1(23942.46,13426.84)
  MidLayer2 (*.G2) w5: v1(23507,15410) 23685,15410 v1@23689,15414
  MidLayer3 (*.G3) w5: v1(23684,15409) 23689,15414 23706,15397 23706,15239.46 23695,15228.46 23695,15084.1 23790.78,14988.31 23790.78,14268.4 23952,14107.18 23952,13985.46 23952,13895.66 23945.96,13889.62 23945.96,13866.84 23957.46,13855.34 23957.46,13702.12 23942.46,13687.12 v1(23942.46,13426.84)
  Bottom Layer (.GBL) w10: R43.1@23729.46,13495.56 R43.1@23729.46,13497.84 23731.46,13497.84 v1(23774.46,13454.84) ; R44.1@23894.46,13432.83 23900.46,13426.84 v1(23942.46,13426.84)
MON_VOD: R31.1 R32.2 U16.48 | length 3507
  Top Layer (.GTL) w5: U16.48@23311.22,15357.5 23312,15358.28 v1(23312,15426)
  Top Layer (.GTL) w10: R31.1@23650.22,12934.92 R32.2@23650.22,12994.92 v1(23697.09,12994.92)
  MidLayer2 (*.G2) w5: v1(23312,15426) 23343.7,15457.7 v1(23720.7,15457.7) ; v1(23697.09,12994.92) 23853.26,12994.92 23966.34,13108 v1(24022,13108)
  MidLayer3 (*.G3) w5: v1@23691.22,13000.8 v1(23697.09,12994.92) ; v1(23720.7,15457.7) 23748,15430.4 23748,15256 23713,15221 23713,15184.89 23826.78,15071.11 23826.78,14283.31 23988,14122.1 23988,14000.37 23988,13915.3 24009.96,13893.35 24009.96,13863.11 23993.46,13846.61 23993.46,13702.12 24022,13673.58 24022,13455.29 24015.75,13449.04 24015.75,13356.63 24030.5,13341.89 24030.5,13154.38 24022,13145.88 v1(24022,13108)
MON_VOG: R26.2 U12.5 U16.33 | length 1801
  Top Layer (.GTL) w5: U16.33@23561.77,15267.5 U16.33@23560.24,15265.96 23561.2,15265 v1(23685,15265) ; R26.2@23824,13875 23818.49,13869.49 U12.5@23767,13869.49 23767,13922 23812.5,13967.5 23902.5,13967.5 v1(23912,13977)
  MidLayer3 (*.G3) w5: v1(23685,15265) 23685,15222 23686,15221 23686,15053.16 23685.7,15052.86 23685.7,15004.3 23763.78,14926.22 23763.78,14257.22 23925,14096 23925,14007.77 23912,13994.77 v1(23912,13977) v1@23912,13976
MON_VRD: R34.2 R35.1 U16.46 | length 3339.7
  Top Layer (.GTL) w5: U16.46@23350.59,15357.5 23351.5,15358.41 23351.5,15418.5 v1(23353,15420)
  Top Layer (.GTL) w10: v1(23865.72,12893.54) v1@23867.24,12892.02
  MidLayer2 (*.G2) w5: v1(23353,15420) 23368,15435 v1(23698,15435) ; v1(23857,13183) 23967,13183 v1(23968,13182)
  MidLayer3 (*.G3) w5: v1(23698,15435) 23727,15406 23727,15247.73 23704,15224.73 23704,15104.79 23799.78,15009.01 23799.78,14272.13 23961,14110.91 23961,13864.52 23966.46,13859.06 23966.46,13698.39 23956.96,13688.89 23956.96,13673.56 23968,13662.52 23968,13453.38 23967.38,13452.77 23967.38,13182.62 v1(23968,13182) ; v1(23857,13183) 23857.22,13182.78 23857.22,13035.88 23865.72,13027.38 v1(23865.72,12893.54)
  Bottom Layer (.GBL) w10: R34.2@23765.22,12939.92 R35.1@23830.21,12939.92 23830.21,12929.05 v1(23865.72,12893.54)
  other v1: 23865.72,12893.54
MPP: J1.20 U9.37 | length 2677.8
  Top Layer (.GTL) w5: U9.37@23232.72,14064.37 23232.72,14023.36 23258,13998.08 v1(23258,13895)
  Bottom Layer (.GBL) w5: J1.20@21684.5,12389.15 21684.5,12471.58 21838.43,12625.5 21859.4,12625.5 22050.9,12817 22610.9,12817 22750,12956.1 22750,13134.1 23258,13642.1 v1(23258,13895)
NetC1A_pos: C1A.POS L1A.2 U3A.6 | length 333
  Top Layer (.GTL) w10: v1(18512.29,14375.39) L1A.2@18562.53,14375.39
  Bottom Layer (.GBL) w10: C1A.POS@18507.37,14249.39 18512.29,14254.31 v1(18512.29,14375.39) 18536.5,14399.61 U3A.6@18656.98,14399.61
NetC1B_pos: C1B.POS L1B.2 U3B.6 | length 333
  Top Layer (.GTL) w10: v1(19398.12,14375.39) L1B.2@19448.35,14375.39
  Bottom Layer (.GBL) w10: C1B.POS@19393.2,14249.39 19398.12,14254.31 v1(19398.12,14375.39) 19422.33,14399.61 U3B.6@19542.8,14399.61
NetC1C_pos: C1C.POS L1C.2 U3C.6 | length 333
  Top Layer (.GTL) w10: v1(20283.95,14375.39) L1C.2@20334.18,14375.39
  Bottom Layer (.GBL) w10: C1C.POS@20279.02,14249.39 20283.95,14254.31 v1(20283.95,14375.39) 20308.16,14399.61 U3C.6@20428.63,14399.61
NetC1D_pos: C1D.POS L1D.2 U3D.6 | length 333
  Top Layer (.GTL) w10: v1(21169.77,14375.39) L1D.2@21220.01,14375.39
  Bottom Layer (.GBL) w10: C1D.POS@21164.85,14249.39 21169.77,14254.31 v1(21169.77,14375.39) 21193.98,14399.61 U3D.6@21314.46,14399.61
NetC1E_pos: C1E.POS L1E.2 U3E.6 | length 333
  Top Layer (.GTL) w10: v1(22055.6,14375.39) L1E.2@22105.84,14375.39
  Bottom Layer (.GBL) w10: C1E.POS@22050.68,14249.39 22055.6,14254.31 v1(22055.6,14375.39) 22079.81,14399.61 U3E.6@22200.28,14399.61
NetC1F_pos: C1F.POS L1F.2 U3F.6 | length 333
  Top Layer (.GTL) w10: v1(18512.29,13784.84) L1F.2@18562.53,13784.84
  Bottom Layer (.GBL) w10: C1F.POS@18507.37,13658.84 18512.29,13663.76 v1(18512.29,13784.84) 18536.5,13809.05 U3F.6@18656.98,13809.05
NetC1G_pos: C1G.POS L1G.2 U3G.6 | length 333
  Top Layer (.GTL) w10: v1(19398.12,13784.84) L1G.2@19448.35,13784.84
  Bottom Layer (.GBL) w10: C1G.POS@19393.2,13658.84 19398.12,13663.76 v1(19398.12,13784.84) 19422.33,13809.05 U3G.6@19542.8,13809.05
NetC1H_pos: C1H.POS L1H.2 U3H.6 | length 333
  Top Layer (.GTL) w10: v1(20283.95,13784.84) L1H.2@20334.18,13784.84
  Bottom Layer (.GBL) w10: C1H.POS@20279.02,13658.84 20283.95,13663.76 v1(20283.95,13784.84) 20308.16,13809.05 U3H.6@20428.63,13809.05
NetC1I_pos: C1I.POS L1I.2 U3I.6 | length 333
  Top Layer (.GTL) w10: v1(21169.77,13784.84) L1I.2@21220.01,13784.84
  Bottom Layer (.GBL) w10: C1I.POS@21164.85,13658.84 21169.77,13663.76 v1(21169.77,13784.84) 21193.98,13809.05 U3I.6@21314.46,13809.05
NetC1J_pos: C1J.POS L1J.2 U3J.6 | length 333
  Top Layer (.GTL) w10: v1(22055.6,13784.84) L1J.2@22105.84,13784.84
  Bottom Layer (.GBL) w10: C1J.POS@22050.68,13658.84 22055.6,13663.76 v1(22055.6,13784.84) 22079.81,13809.05 U3J.6@22200.28,13809.05
NetC1K_pos: C1K.POS L1K.2 U3K.6 | length 333
  Top Layer (.GTL) w10: v1(18512.29,13213.98) L1K.2@18562.53,13213.98
  Bottom Layer (.GBL) w10: C1K.POS@18507.37,13087.98 18512.29,13092.9 v1(18512.29,13213.98) 18536.5,13238.19 U3K.6@18656.97,13238.19
NetC1L_pos: C1L.POS L1L.2 U3L.6 | length 333
  Top Layer (.GTL) w10: v1(19398.12,13213.98) L1L.2@19448.35,13213.98
  Bottom Layer (.GBL) w10: C1L.POS@19393.2,13087.98 19398.12,13092.9 v1(19398.12,13213.98) 19422.33,13238.19 U3L.6@19542.8,13238.19
NetC1M_pos: C1M.POS L1M.2 U3M.6 | length 333
  Top Layer (.GTL) w10: v1(20283.95,13213.98) L1M.2@20334.18,13213.98
  Bottom Layer (.GBL) w10: C1M.POS@20279.02,13087.98 20283.95,13092.9 v1(20283.95,13213.98) 20308.16,13238.19 U3M.6@20428.63,13238.19
NetC1N_pos: C1N.POS L1N.2 U3N.6 | length 333
  Top Layer (.GTL) w10: v1(21169.77,13213.98) L1N.2@21220.01,13213.98
  Bottom Layer (.GBL) w10: C1N.POS@21164.85,13087.98 21169.77,13092.9 v1(21169.77,13213.98) 21193.98,13238.19 U3N.6@21314.46,13238.19
NetC1O_pos: C1O.POS L1O.2 U3O.6 | length 333
  Top Layer (.GTL) w10: v1(22055.6,13213.98) L1O.2@22105.84,13213.98
  Bottom Layer (.GBL) w10: C1O.POS@22050.68,13087.98 22055.6,13092.9 v1(22055.6,13213.98) 22079.81,13238.19 U3O.6@22200.28,13238.19
NetC2A_2: C2A.2 U1A.1 U2A.8 | length 209.3
  Top Layer (.GTL) w10: C2A.2@18714.06,14518.82 18714.06,14518.11 v1(18772.12,14460.05) U1A.1@18804.61,14427.56 18849.89,14382.28 U2A.8@18849.89,14371.65
  Bottom Layer (.GBL) w10: v1@18767.98,14455.9 v1(18772.12,14460.05)
NetC2B_2: C2B.2 U1B.1 U2B.8 | length 209.3
  Top Layer (.GTL) w10: C2B.2@19599.89,14518.82 19599.89,14518.11 v1(19657.95,14460.05) U1B.1@19690.44,14427.56 19735.72,14382.28 U2B.8@19735.72,14371.66
  Bottom Layer (.GBL) w10: v1@19653.8,14455.9 v1(19657.95,14460.05)
NetC2C_2: C2C.2 U1C.1 U2C.8 | length 209.3
  Top Layer (.GTL) w10: C2C.2@20485.72,14518.82 20485.72,14518.11 v1(20543.78,14460.05) U1C.1@20576.27,14427.56 20621.54,14382.28 U2C.8@20621.54,14371.65
  Bottom Layer (.GBL) w10: v1@20539.63,14455.9 v1(20543.78,14460.05)
NetC2D_2: C2D.2 U1D.1 U2D.8 | length 209.3
  Top Layer (.GTL) w10: C2D.2@21371.54,14518.82 21371.54,14518.11 v1(21429.6,14460.05) U1D.1@21462.09,14427.56 21507.37,14382.28 U2D.8@21507.37,14371.65
  Bottom Layer (.GBL) w10: v1@21425.46,14455.9 v1(21429.6,14460.05)
NetC2E_2: C2E.2 U1E.1 U2E.8 | length 209.3
  Top Layer (.GTL) w10: C2E.2@22257.37,14518.82 22257.37,14518.11 v1(22315.43,14460.05) U1E.1@22347.92,14427.56 22393.2,14382.28 U2E.8@22393.2,14371.66
  Bottom Layer (.GBL) w10: v1@22311.28,14455.9 v1(22315.43,14460.05)
NetC2F_2: C2F.2 U1F.1 U2F.8 | length 209.3
  Top Layer (.GTL) w10: C2F.2@18714.06,13928.27 18714.06,13927.56 v1(18772.12,13869.5) U1F.1@18804.61,13837.01 18849.89,13791.73 U2F.8@18849.89,13781.1
  Bottom Layer (.GBL) w10: v1@18767.98,13865.35 v1(18772.12,13869.5)
NetC2G_2: C2G.2 U1G.1 U2G.8 | length 209.3
  Top Layer (.GTL) w10: C2G.2@19599.89,13928.27 19599.89,13927.56 v1(19657.95,13869.5) U1G.1@19690.44,13837.01 19735.72,13791.73 U2G.8@19735.72,13781.1
  Bottom Layer (.GBL) w10: v1@19653.8,13865.35 v1(19657.95,13869.5)
NetC2H_2: C2H.2 U1H.1 U2H.8 | length 209.3
  Top Layer (.GTL) w10: C2H.2@20485.72,13928.27 20485.72,13927.56 v1(20543.78,13869.5) U1H.1@20576.27,13837.01 20621.54,13791.73 U2H.8@20621.54,13781.1
  Bottom Layer (.GBL) w10: v1@20539.63,13865.35 v1(20543.78,13869.5)
NetC2I_2: C2I.2 U1I.1 U2I.8 | length 209.3
  Top Layer (.GTL) w10: C2I.2@21371.54,13928.27 21371.54,13927.56 v1(21429.6,13869.5) U1I.1@21462.09,13837.01 21507.37,13791.73 U2I.8@21507.37,13781.1
  Bottom Layer (.GBL) w10: v1@21425.46,13865.35 v1(21429.6,13869.5)
NetC2J_2: C2J.2 U1J.1 U2J.8 | length 209.3
  Top Layer (.GTL) w10: C2J.2@22257.37,13928.27 22257.37,13927.56 v1(22315.43,13869.5) U1J.1@22347.92,13837.01 22393.2,13791.73 U2J.8@22393.2,13781.1
  Bottom Layer (.GBL) w10: v1@22311.28,13865.35 v1(22315.43,13869.5)
NetC2K_2: C2K.2 U1K.1 U2K.8 | length 209.3
  Top Layer (.GTL) w10: C2K.2@18714.06,13357.4 18714.06,13356.69 v1(18772.12,13298.63) U1K.1@18804.61,13266.14 18849.89,13220.87 U2K.8@18849.89,13210.24
  Bottom Layer (.GBL) w10: v1@18767.98,13294.48 v1(18772.12,13298.63)
NetC2L_2: C2L.2 U1L.1 U2L.8 | length 209.3
  Top Layer (.GTL) w10: C2L.2@19599.89,13357.4 19599.89,13356.69 v1(19657.95,13298.63) U1L.1@19690.44,13266.14 19735.72,13220.87 U2L.8@19735.72,13210.24
  Bottom Layer (.GBL) w10: v1@19653.8,13294.48 v1(19657.95,13298.63)
NetC2M_2: C2M.2 U1M.1 U2M.8 | length 209.3
  Top Layer (.GTL) w10: C2M.2@20485.72,13357.4 20485.72,13356.69 v1(20543.78,13298.63) U1M.1@20576.27,13266.14 20621.54,13220.87 U2M.8@20621.54,13210.24
  Bottom Layer (.GBL) w10: v1@20539.63,13294.48 v1(20543.78,13298.63)
NetC2N_2: C2N.2 U1N.1 U2N.8 | length 209.3
  Top Layer (.GTL) w10: C2N.2@21371.54,13357.4 21371.54,13356.69 v1(21429.6,13298.63) U1N.1@21462.09,13266.14 21507.37,13220.87 U2N.8@21507.37,13210.24
  Bottom Layer (.GBL) w10: v1@21425.46,13294.48 v1(21429.6,13298.63)
NetC2O_2: C2O.2 U1O.1 U2O.8 | length 209.3
  Top Layer (.GTL) w10: C2O.2@22257.37,13357.4 22257.37,13356.69 v1(22315.43,13298.63) 22347.92,13266.14 22393.2,13220.87 U2O.8@22393.2,13210.24
  Bottom Layer (.GBL) w10: v1@22311.28,13294.48 v1(22315.43,13298.63)
NetC3A_neg: C3A.NEG L2A.2 U3A.3 | length 339.5
  Top Layer (.GTL) w10: L2A.2@18944.34,14375.39 18944.34,14356.73 18978.83,14322.24 v1(18997.53,14322.24)
  Bottom Layer (.GBL) w10: U3A.3@18849.89,14399.61 18920.17,14399.61 v1(18997.53,14322.24) 18999.5,14320.28 C3A.NEG@18999.5,14249.39
  other v1: 18997.53,14322.24
NetC3B_neg: C3B.NEG L2B.2 U3B.3 | length 339.5
  Top Layer (.GTL) w10: L2B.2@19830.17,14375.39 19830.17,14356.73 19864.65,14322.24 v1(19883.35,14322.24)
  Bottom Layer (.GBL) w10: U3B.3@19735.72,14399.61 19805.99,14399.61 v1(19883.35,14322.24) 19885.32,14320.28 C3B.NEG@19885.32,14249.39
  other v1: 19883.35,14322.24
NetC3C_neg: C3C.NEG L2C.2 U3C.3 | length 339.5
  Top Layer (.GTL) w10: L2C.2@20715.99,14375.39 20715.99,14356.73 20750.48,14322.24 v1(20769.18,14322.24)
  Bottom Layer (.GBL) w10: U3C.3@20621.54,14399.61 20691.82,14399.61 v1(20769.18,14322.24) 20771.15,14320.28 C3C.NEG@20771.15,14249.39
  other v1: 20769.18,14322.24
NetC3D_neg: C3D.NEG L2D.2 U3D.3 | length 339.5
  Top Layer (.GTL) w10: L2D.2@21601.82,14375.39 21601.82,14356.73 21636.31,14322.24 v1(21655.01,14322.24)
  Bottom Layer (.GBL) w10: U3D.3@21507.37,14399.61 21577.65,14399.61 v1(21655.01,14322.24) 21656.98,14320.28 C3D.NEG@21656.98,14249.39
  other v1: 21655.01,14322.24
NetC3E_neg: C3E.NEG L2E.2 U3E.3 | length 339.5
  Top Layer (.GTL) w10: L2E.2@22487.65,14375.39 22487.65,14356.73 22522.13,14322.24 v1(22540.84,14322.24)
  Bottom Layer (.GBL) w10: U3E.3@22393.2,14399.61 22463.47,14399.61 v1(22540.84,14322.24) 22542.8,14320.28 C3E.NEG@22542.8,14249.39
  other v1: 22540.84,14322.24
NetC3F_neg: C3F.NEG L2F.2 U3F.3 | length 339.5
  Top Layer (.GTL) w10: L2F.2@18944.34,13784.84 18944.34,13766.18 18978.83,13731.69 v1(18997.53,13731.69)
  Bottom Layer (.GBL) w10: U3F.3@18849.89,13809.05 18920.17,13809.05 v1(18997.53,13731.69) 18999.5,13729.72 C3F.NEG@18999.5,13658.84
  other v1: 18997.53,13731.69
NetC3G_neg: C3G.NEG L2G.2 U3G.3 | length 339.5
  Top Layer (.GTL) w10: L2G.2@19830.17,13784.84 19830.17,13766.18 19864.65,13731.69 v1(19883.35,13731.69)
  Bottom Layer (.GBL) w10: U3G.3@19735.72,13809.05 19805.99,13809.05 v1(19883.35,13731.69) 19885.32,13729.72 C3G.NEG@19885.32,13658.84
  other v1: 19883.35,13731.69
NetC3H_neg: C3H.NEG L2H.2 U3H.3 | length 339.5
  Top Layer (.GTL) w10: L2H.2@20715.99,13784.84 20715.99,13766.18 20750.48,13731.69 v1(20769.18,13731.69)
  Bottom Layer (.GBL) w10: U3H.3@20621.54,13809.05 20691.82,13809.05 v1(20769.18,13731.69) 20771.15,13729.72 C3H.NEG@20771.15,13658.84
  other v1: 20769.18,13731.69
NetC3I_neg: C3I.NEG L2I.2 U3I.3 | length 339.5
  Top Layer (.GTL) w10: L2I.2@21601.82,13784.84 21601.82,13766.18 21636.31,13731.69 v1(21655.01,13731.69)
  Bottom Layer (.GBL) w10: U3I.3@21507.37,13809.05 21577.65,13809.05 v1(21655.01,13731.69) 21656.98,13729.72 C3I.NEG@21656.98,13658.84
  other v1: 21655.01,13731.69
NetC3J_neg: C3J.NEG L2J.2 U3J.3 | length 339.5
  Top Layer (.GTL) w10: L2J.2@22487.65,13784.84 22487.65,13766.18 22522.13,13731.69 v1(22540.84,13731.69)
  Bottom Layer (.GBL) w10: U3J.3@22393.2,13809.05 22463.47,13809.05 v1(22540.84,13731.69) 22542.8,13729.72 C3J.NEG@22542.8,13658.84
  other v1: 22540.84,13731.69
NetC3K_neg: C3K.NEG L2K.2 U3K.3 | length 339.5
  Top Layer (.GTL) w10: L2K.2@18944.34,13213.98 18944.34,13195.31 18978.83,13160.83 v1(18997.53,13160.83)
  Bottom Layer (.GBL) w10: U3K.3@18849.89,13238.19 18920.17,13238.19 v1(18997.53,13160.83) 18999.5,13158.86 C3K.NEG@18999.5,13087.98
  other v1: 18997.53,13160.83
NetC3L_neg: C3L.NEG L2L.2 U3L.3 | length 339.5
  Top Layer (.GTL) w10: L2L.2@19830.17,13213.98 19830.17,13195.31 19864.65,13160.83 v1(19883.35,13160.83)
  Bottom Layer (.GBL) w10: U3L.3@19735.72,13238.19 19805.99,13238.19 v1(19883.35,13160.83) 19885.32,13158.86 C3L.NEG@19885.32,13087.98
  other v1: 19883.35,13160.83
NetC3M_neg: C3M.NEG L2M.2 U3M.3 | length 339.5
  Top Layer (.GTL) w10: L2M.2@20715.99,13213.98 20715.99,13195.31 20750.48,13160.83 v1(20769.18,13160.83)
  Bottom Layer (.GBL) w10: U3M.3@20621.54,13238.19 20691.82,13238.19 v1(20769.18,13160.83) 20771.15,13158.86 C3M.NEG@20771.15,13087.98
  other v1: 20769.18,13160.83
NetC3N_neg: C3N.NEG L2N.2 U3N.3 | length 339.5
  Top Layer (.GTL) w10: L2N.2@21601.82,13213.98 21601.82,13195.31 21636.31,13160.83 v1(21655.01,13160.83)
  Bottom Layer (.GBL) w10: U3N.3@21507.37,13238.19 21577.65,13238.19 v1(21655.01,13160.83) 21656.98,13158.86 C3N.NEG@21656.98,13087.98
  other v1: 21655.01,13160.83
NetC3O_neg: C3O.NEG L2O.2 U3O.3 | length 339.5
  Top Layer (.GTL) w10: L2O.2@22487.65,13213.98 22487.65,13195.31 22522.13,13160.83 v1(22540.84,13160.83)
  Bottom Layer (.GBL) w10: U3O.3@22393.2,13238.19 22463.47,13238.19 v1(22540.84,13160.83) 22542.8,13158.86 C3O.NEG@22542.8,13087.98
  other v1: 22540.84,13160.83
NetC5A_pos: C5A.POS L3A.2 U6A.6 | length 607
  Top Layer (.GTL) w10: v1(19130.4,15008.31) L3A.2@19130.4,15073.31
  Bottom Layer (.GBL) w10: U6A.6@18800.4,14896.85 18800.4,14861.69 18833.79,14828.31 18860.4,14828.31 19055.4,15023.31 ; C5A.POS@19055.4,15099.31 19055.4,15023.31 ; v1(19130.4,15008.31) 19115.4,15023.31 19055.4,15023.31
NetC5B_pos: C5B.POS L3B.2 U6B.6 | length 607
  Top Layer (.GTL) w10: v1(20203.24,15008.31) L3B.2@20203.24,15073.31
  Bottom Layer (.GBL) w10: U6B.6@19873.24,14896.85 19873.24,14861.69 19906.62,14828.31 19933.24,14828.31 20128.24,15023.31 ; C5B.POS@20128.24,15099.31 20128.24,15023.31 ; v1(20203.24,15008.31) 20188.24,15023.31 20128.24,15023.31
NetC5C_pos: C5C.POS L3C.2 U6C.6 | length 607
  Top Layer (.GTL) w10: v1(21276.07,15008.31) L3C.2@21276.07,15073.31
  Bottom Layer (.GBL) w10: U6C.6@20946.07,14896.85 20946.07,14861.69 20979.46,14828.31 21006.07,14828.31 21201.07,15023.31 ; C5C.POS@21201.07,15099.31 21201.07,15023.31 ; v1(21276.07,15008.31) 21261.07,15023.31 21201.07,15023.31
NetC5D_pos: C5D.POS L3D.2 U6D.6 | length 607
  Top Layer (.GTL) w10: v1(22348.91,15008.31) L3D.2@22348.91,15073.31
  Bottom Layer (.GBL) w10: U6D.6@22018.91,14896.85 22018.91,14861.69 22052.29,14828.31 22078.91,14828.31 22273.91,15023.31 ; C5D.POS@22273.91,15099.31 22273.91,15023.31 ; v1(22348.91,15008.31) 22333.91,15023.31 22273.91,15023.31
NetC8A_neg: C8A.NEG L4A.2 U6A.3 | length 469.9
  Top Layer (.GTL) w10: v1(18575.4,14963.31) 18610.4,14963.31 L4A.2@18620.4,14973.31 v1(18800.4,14973.31)
  Bottom Layer (.GBL) w10: C8A.NEG@18555.4,14847.31 18575.4,14867.31 v1(18575.4,14963.31) ; v1(18800.4,14973.31) U6A.3@18800.4,15089.76
NetC8B_neg: C8B.NEG L4B.2 U6B.3 | length 469.9
  Top Layer (.GTL) w10: v1(19648.24,14963.31) 19683.24,14963.31 L4B.2@19693.24,14973.31 v1(19873.24,14973.31)
  Bottom Layer (.GBL) w10: C8B.NEG@19628.24,14847.31 19648.24,14867.31 v1(19648.24,14963.31) ; v1(19873.24,14973.31) U6B.3@19873.24,15089.76
NetC8C_neg: C8C.NEG L4C.2 U6C.3 | length 469.9
  Top Layer (.GTL) w10: v1(20721.07,14963.31) 20756.07,14963.31 L4C.2@20766.07,14973.31 v1(20946.07,14973.31)
  Bottom Layer (.GBL) w10: C8C.NEG@20701.07,14847.31 20721.07,14867.31 v1(20721.07,14963.31) ; v1(20946.07,14973.31) U6C.3@20946.07,15089.76
NetC8D_neg: C8D.NEG L4D.2 U6D.3 | length 469.9
  Top Layer (.GTL) w10: v1(21793.91,14963.31) 21828.91,14963.31 L4D.2@21838.91,14973.31 v1(22018.91,14973.31)
  Bottom Layer (.GBL) w10: C8D.NEG@21773.91,14847.31 21793.91,14867.31 v1(21793.91,14963.31) ; v1(22018.91,14973.31) U6D.3@22018.91,15089.76
NetC10A_1: C10A.1 R7A.1 R8A.2 U8A.8 | length 330.5
  Top Layer (.GTL) w10: R8A.2@18497.29,15839.41 18550.44,15892.56 v1(18550.44,15918.43)
  Bottom Layer (.GBL) w10: v1(18550.44,15918.43) 18505.44,15918.43 R7A.1@18497.29,15926.58 18497.29,15840.82 18508.07,15830.04 U8A.8@18579.97,15830.04
NetC10A_2: C10A.2 Q1A.1 U8A.7 | length 256.3
  Top Layer (.GTL) w10: Q1A.1@18593.75,15839.68 v1(18640.99,15839.69)
  Bottom Layer (.GBL) w10: C10A.2@18498.7,15749.41 18529.33,15780.04 U8A.7@18579.97,15780.04 18631.54,15780.04 18640.99,15789.49 v1(18640.99,15839.69)
NetC10B_1: C10B.1 R7B.1 R8B.2 U8B.8 | length 330.5
  Top Layer (.GTL) w10: R8B.2@19284.69,15839.41 19337.84,15892.56 v1(19337.84,15918.43)
  Bottom Layer (.GBL) w10: v1(19337.84,15918.43) 19292.84,15918.43 R7B.1@19284.69,15926.58 19284.69,15840.82 19295.48,15830.04 U8B.8@19367.37,15830.04
NetC10B_2: C10B.2 Q1B.1 U8B.7 | length 256.3
  Top Layer (.GTL) w10: Q1B.1@19381.15,15839.68 v1(19428.39,15839.69)
  Bottom Layer (.GBL) w10: C10B.2@19286.11,15749.41 19316.74,15780.04 U8B.7@19367.37,15780.04 19418.94,15780.04 19428.39,15789.49 v1(19428.39,15839.69)
NetC10C_1: C10C.1 R7C.1 R8C.2 U8C.8 | length 330.5
  Top Layer (.GTL) w10: R8C.2@20072.09,15839.41 20125.24,15892.56 v1(20125.24,15918.43)
  Bottom Layer (.GBL) w10: v1(20125.24,15918.43) 20080.24,15918.43 R7C.1@20072.09,15926.58 20072.09,15840.82 20082.88,15830.04 U8C.8@20154.77,15830.04
NetC10C_2: C10C.2 Q1C.1 U8C.7 | length 256.3
  Top Layer (.GTL) w10: Q1C.1@20168.55,15839.68 v1(20215.8,15839.69)
  Bottom Layer (.GBL) w10: C10C.2@20073.51,15749.41 20104.14,15780.04 U8C.7@20154.77,15780.04 20206.35,15780.04 20215.8,15789.49 v1(20215.8,15839.69)
NetC10D_1: C10D.1 R7D.1 R8D.2 U8D.8 | length 330.5
  Top Layer (.GTL) w10: R8D.2@20859.5,15839.41 20912.65,15892.56 v1(20912.65,15918.43)
  Bottom Layer (.GBL) w10: v1(20912.65,15918.43) 20867.65,15918.43 R7D.1@20859.5,15926.58 20859.5,15840.82 20870.28,15830.04 U8D.8@20942.17,15830.04
NetC10D_2: C10D.2 Q1D.1 U8D.7 | length 256.3
  Top Layer (.GTL) w10: Q1D.1@20955.95,15839.68 v1(21003.2,15839.69)
  Bottom Layer (.GBL) w10: C10D.2@20860.91,15749.41 20891.54,15780.04 U8D.7@20942.17,15780.04 20993.75,15780.04 21003.2,15789.49 v1(21003.2,15839.69)
NetC10E_1: C10E.1 R7E.1 R8E.2 U8E.8 | length 330.5
  Top Layer (.GTL) w10: R8E.2@21646.9,15839.41 21700.05,15892.56 v1(21700.05,15918.43)
  Bottom Layer (.GBL) w10: v1(21700.05,15918.43) 21655.05,15918.43 R7E.1@21646.9,15926.58 21646.9,15840.82 21657.68,15830.04 U8E.8@21729.58,15830.04
NetC10E_2: C10E.2 Q1E.1 U8E.7 | length 256.3
  Top Layer (.GTL) w10: Q1E.1@21743.35,15839.68 v1(21790.6,15839.69)
  Bottom Layer (.GBL) w10: C10E.2@21648.31,15749.41 21678.94,15780.04 U8E.7@21729.58,15780.04 21781.15,15780.04 21790.6,15789.49 v1(21790.6,15839.69)
NetC10F_1: C10F.1 R7F.1 R8F.2 U8F.8 | length 330.5
  Top Layer (.GTL) w10: R8F.2@22434.3,15839.41 22487.45,15892.56 v1(22487.45,15918.43)
  Bottom Layer (.GBL) w10: v1(22487.45,15918.43) 22442.45,15918.43 R7F.1@22434.3,15926.58 22434.3,15840.82 22445.08,15830.04 U8F.8@22516.97,15830.04
NetC10F_2: C10F.2 Q1F.1 U8F.7 | length 256.3
  Top Layer (.GTL) w10: Q1F.1@22530.75,15839.68 v1(22578,15839.69)
  Bottom Layer (.GBL) w10: C10F.2@22435.71,15749.41 22466.34,15780.04 U8F.7@22516.97,15780.04 22568.55,15780.04 22578,15789.49 v1(22578,15839.69)
NetC15A_1: C15A.1 R9A.2 R10A.1 U8A.4 | length 362.7
  Top Layer (.GTL) w10: R10A.1@18861.46,15660.83 18938.17,15660.83 v1(18950,15649)
  Bottom Layer (.GBL) w10: U8A.4@18768.94,15680.04 18843.67,15680.04 C15A.1@18862.88,15660.83 18862.88,15590.55 R9A.2@18861.46,15589.13 ; R9A.2@18874.33,15602 18903,15602 v1(18950,15649)